# EAGLE board etch_a_sketch (EAGLE 9.6.2)
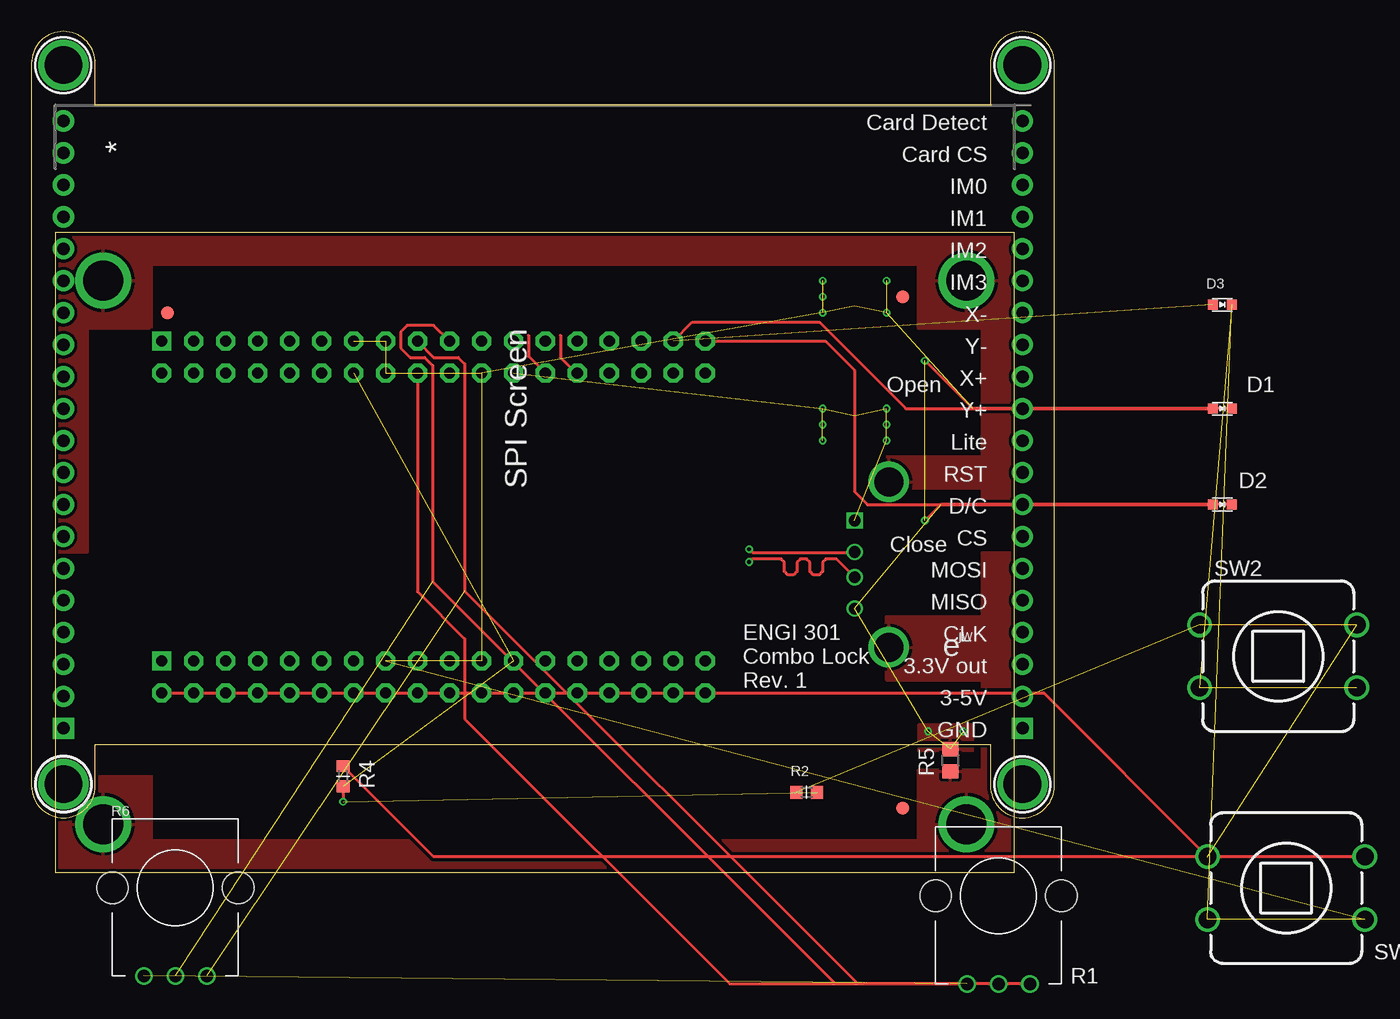
[diagram p0: board, top side]
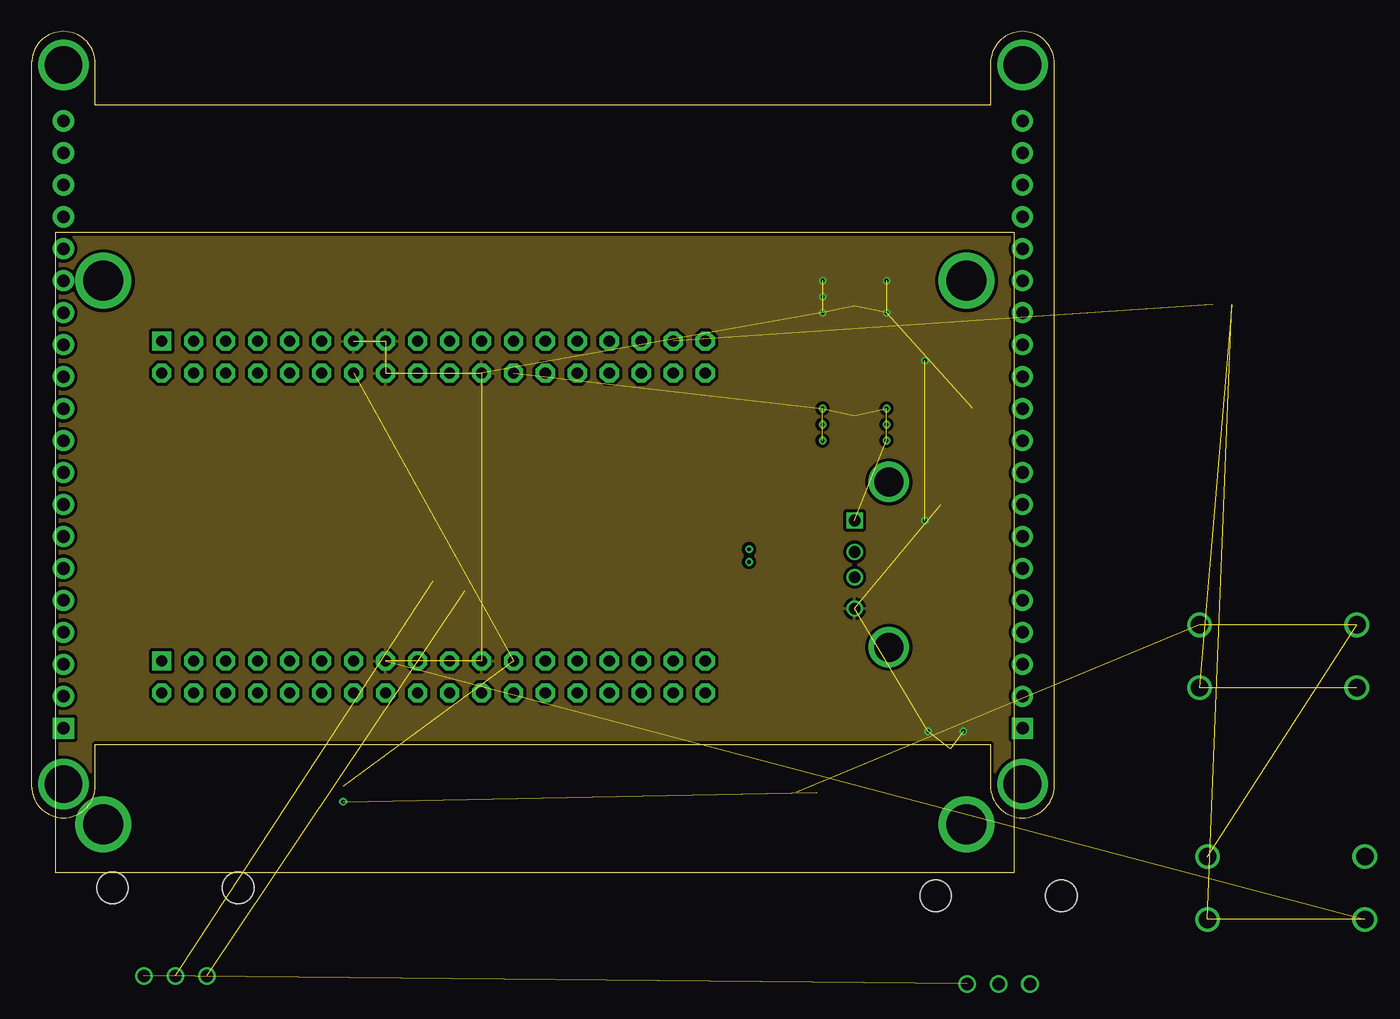
[diagram p1: board, inner layer Route2]
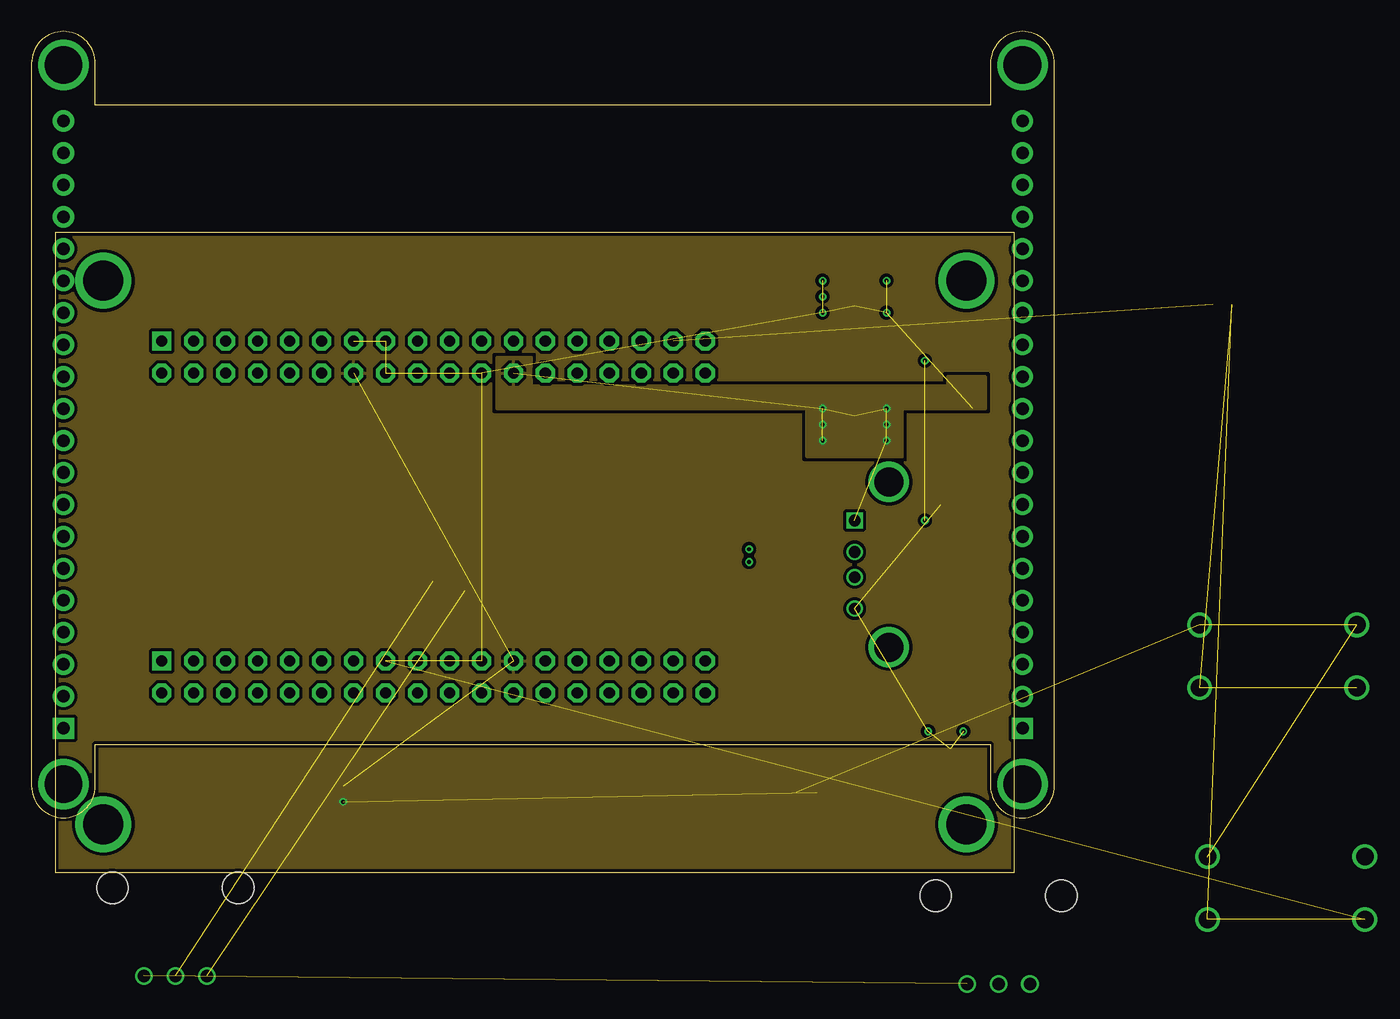
[diagram p2: board, inner layer Route15]
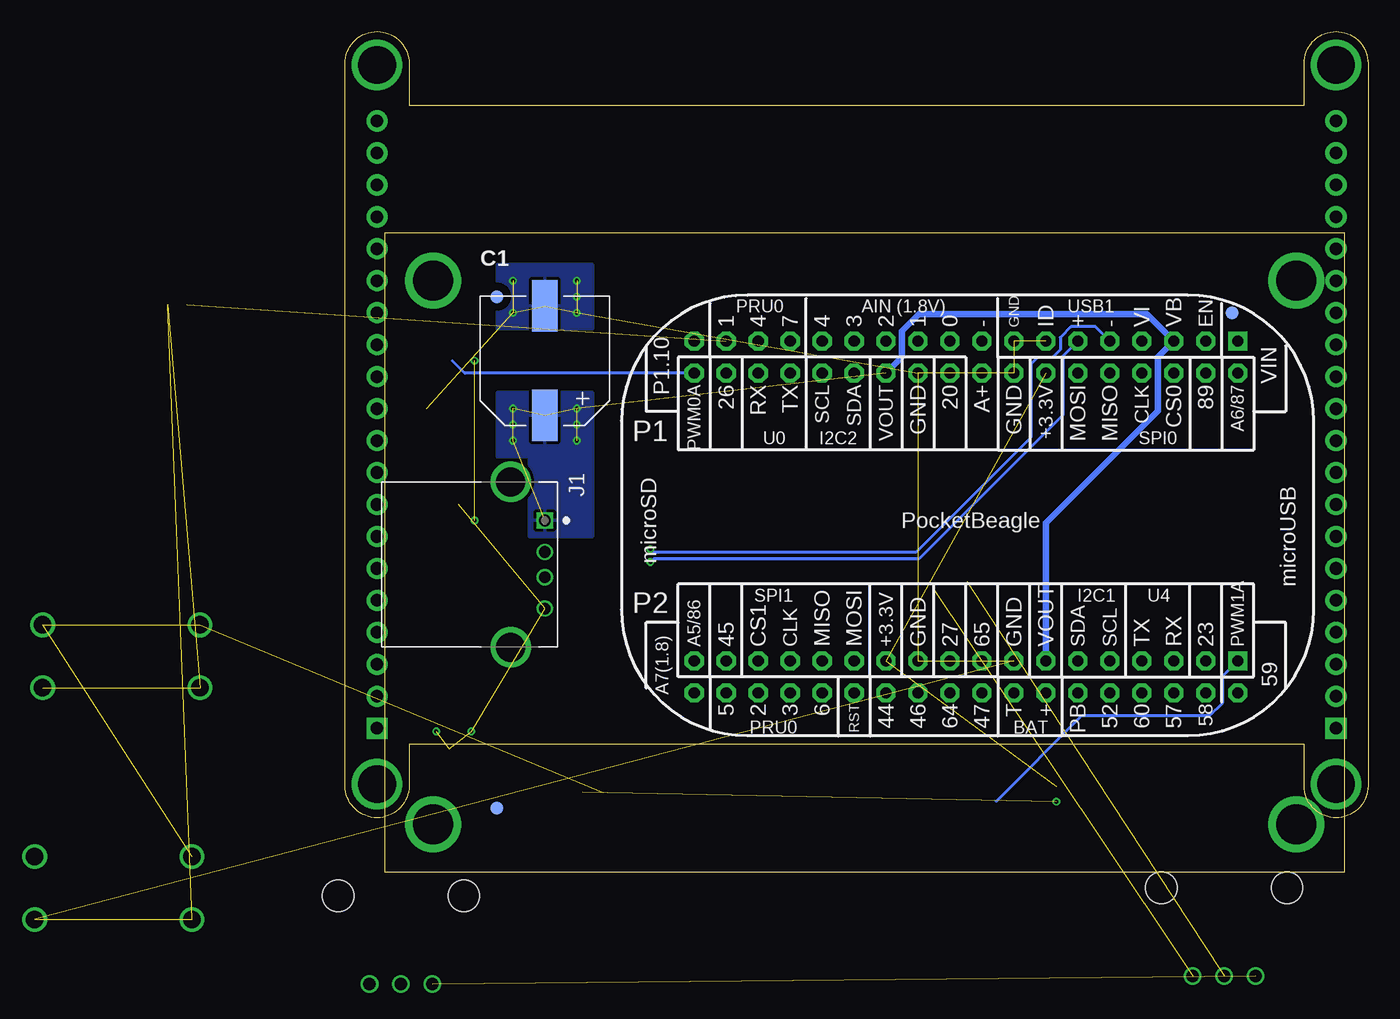
[diagram p3: board, bottom side, seen from below]

Size 81.28 x 66.8 mm. Coordinates in mm from the lower left corner, seen from the top.
Outline: 1.91,0 78.11,0 78.11,50.8 1.91,50.8 1.91,0
Copper layers (1*2*15*16): Top 0.035mm / dielectric 0.23mm / Route2 0.035mm / dielectric 0.93mm / Route15 0.035mm / dielectric 0.23mm / Bottom 0.035mm
Design rules "ENGI301_4lyr": minimum track width 10mil, minimum drill 12mil, track to track 10mil, track to pad 10mil, pad to pad 10mil, via to via 10mil, smd to smd 10mil, copper to edge 10mil, drill to drill 12mil, minimum pad ring 6mil, minimum via ring 6mil, stop-mask expansion 3mil, vias tented up to drill 25mil, thermal gap 10mil

## Footprints (pad centres in the part's own frame; a part is rotated, then mirrored left to right if it is on the bottom)
CP10MM = smd 2 x 4.1: P$1 0,-4.35; P$2 0,4.35
EIA-STD = smd 0.8 x 0.8: ANODE -0.75,0; CATHODE 0.75,0
FIDUCIAL_40MIL = smd 1.016 x 1.016: P$1 0,0
TE_292303-1 = drill 0.92 square: 1 0,0 | drill 0.92: 2 2.5,0; 3 4.5,0; 4 7,0 | drill 2.3: SH1 -3.07,-2.71; SH2 10.07,-2.71
TFT_LCD_PCB = drill 1 pad 1.676 square: 1@JP1 -24.13,38.1; 1@JP2 -24.13,-38.1 | drill 1 pad 1.676: 2@JP1 -21.59,38.1; 2@JP2 -21.59,-38.1; 3@JP1 -19.05,38.1; 3@JP2 -19.05,-38.1; 4@JP1 -16.51,38.1; 4@JP2 -16.51,-38.1; 5@JP1 -13.97,38.1; 5@JP2 -13.97,-38.1; 6@JP1 -11.43,38.1; 6@JP2 -11.43,-38.1; 7@JP1 -8.89,38.1; 7@JP2 -8.89,-38.1; 8@JP1 -6.35,38.1; 8@JP2 -6.35,-38.1; 9@JP1 -3.81,38.1; 9@JP2 -3.81,-38.1; 10@JP1 -1.27,38.1; 10@JP2 -1.27,-38.1; 11@JP1 1.27,38.1; 11@JP2 1.27,-38.1; 12@JP1 3.81,38.1; 12@JP2 3.81,-38.1; 13@JP1 6.35,38.1; 13@JP2 6.35,-38.1; 14@JP1 8.89,38.1; 14@JP2 8.89,-38.1; 15@JP1 11.43,38.1; 15@JP2 11.43,-38.1; 16@JP1 13.97,38.1; 16@JP2 13.97,-38.1; 17@JP1 16.51,38.1; 17@JP2 16.51,-38.1; 18@JP1 19.05,38.1; 18@JP2 19.05,-38.1; 19@JP1 21.59,38.1; 19@JP2 21.59,-38.1; 20@JP1 24.13,38.1; 20@JP2 24.13,-38.1 | drill 3 pad 3.6: P$1@U$7 -28.575,-38.1; P$1@U$15 28.575,-38.1; P$1@U$16 -28.575,38.1; P$1@U$17 28.575,38.1
MOUNTING_HOLE = drill 3.175 pad 4.445: P$1 0,0
POT-PO90S = drill 1: CCW -2.5,0; CW 2.5,0; S 0,0 | hole 2.5: -5,7; 5,7
R0603 = smd 0.95 x 1.031: 1 -0.8,0; 2 0.8,0
R0805 = smd 1.143 x 1.27: 1 -0.889,0; 2 0.889,0
BUTTON_12.5MM = drill 1.4: 1 -6.25,2.5; 2 -6.25,-2.5; 3 6.25,2.5; 4 6.25,-2.5
POCKETBEAGLE = drill 0.889 pad 1.524 square: P1_01 5.91,3.53; P2_01 5.91,28.93 | drill 0.889 pad 1.524 octagon: P1_02 5.91,6.07; P1_03 8.45,3.53; P1_04 8.45,6.07; P1_05 10.99,3.53; P1_06 10.99,6.07; P1_07 13.53,3.53; P1_08 13.53,6.07; P1_09 16.07,3.53; P1_10 16.07,6.07; P1_11 18.61,3.53; P1_12 18.61,6.07; P1_13 21.15,3.53; P1_14 21.15,6.07; P1_15 23.69,3.53; P1_16 23.69,6.07; P1_17 26.23,3.53; P1_18 26.23,6.07; P1_19 28.77,3.53; P1_20 28.77,6.07; P1_21 31.31,3.53; P1_22 31.31,6.07; P1_23 33.85,3.53; P1_24 33.85,6.07; P1_25 36.39,3.53; P1_26 36.39,6.07; P1_27 38.93,3.53; P1_28 38.93,6.07; P1_29 41.47,3.53; P1_30 41.47,6.07; P1_31 44.01,3.53; P1_32 44.01,6.07; P1_33 46.55,3.53; P1_34 46.55,6.07; P1_35 49.09,3.53; P1_36 49.09,6.07; P2_02 5.91,31.47; P2_03 8.45,28.93; P2_04 8.45,31.47; P2_05 10.99,28.93; P2_06 10.99,31.47; P2_07 13.53,28.93; P2_08 13.53,31.47; P2_09 16.07,28.93; P2_10 16.07,31.47; P2_11 18.61,28.93; P2_12 18.61,31.47; P2_13 21.15,28.93; P2_14 21.15,31.47; P2_15 23.69,28.93; P2_16 23.69,31.47; P2_17 26.23,28.93; P2_18 26.23,31.47; P2_19 28.77,28.93; P2_20 28.77,31.47; P2_21 31.31,28.93; P2_22 31.31,31.47; P2_23 33.85,28.93; P2_24 33.85,31.47; P2_25 36.39,28.93; P2_26 36.39,31.47; P2_27 38.93,28.93; P2_28 38.93,31.47; P2_29 41.47,28.93; P2_30 41.47,31.47; P2_31 44.01,28.93; P2_32 44.01,31.47; P2_33 46.55,28.93; P2_34 46.55,31.47; P2_35 49.09,28.93; P2_36 49.09,31.47

## Placement (x,y rotation side)
C1  220uF  [CP10MM]  65.41,40.64 0 bottom
D1  GRN LED  [EIA-STD]  94.61,36.83 0 top  (outside the outline)
D2  RED LED  [EIA-STD]  94.61,29.21 0 top  (outside the outline)
D3  GRN LED  [EIA-STD]  94.61,45.09 0 top  (outside the outline)
FUD1  FIDUCIAL  [FIDUCIAL_40MIL]  69.22,45.72 0 top
FUD2  FIDUCIAL  [FIDUCIAL_40MIL]  69.22,5.08 0 top
FUD3  FIDUCIAL  [FIDUCIAL_40MIL]  10.8,44.45 0 bottom
FUD4  FIDUCIAL  [FIDUCIAL_40MIL]  69.22,45.72 0 bottom
FUD5  FIDUCIAL  [FIDUCIAL_40MIL]  69.22,5.08 0 bottom
FUD6  FIDUCIAL  [FIDUCIAL_40MIL]  10.8,44.45 0 top
J1  292303-1  [TE_292303-1]  65.41,27.94 270 bottom
J2  SPI_LCD  [TFT_LCD_PCB]  40.64,35.56 90 top
MGT1  MOUNTING_HOLE  [MOUNTING_HOLE]  5.72,46.99 0 top
MGT2  MOUNTING_HOLE  [MOUNTING_HOLE]  5.72,3.81 0 top
MGT3  MOUNTING_HOLE  [MOUNTING_HOLE]  74.3,3.81 0 top
MGT4  MOUNTING_HOLE  [MOUNTING_HOLE]  74.3,46.99 0 top
R1  POTENTIOMETER  [POT-PO90S]  76.84,-8.89 0 top
R2  1k  [R0603]  61.59,6.35 0 top
R4  1k  [R0603]  24.77,7.62 270 top
R5  0.1  [R0805]  73.03,8.89 90 top
R6  POTENTIOMETER  [POT-PO90S]  11.43,-8.26 0 top
SW1  PUSH_BUTTON  [BUTTON_12.5MM]  99.7,-1.27 0 top  (outside the outline)
SW2  PUSH_BUTTON  [BUTTON_12.5MM]  99.06,17.14 0 top  (outside the outline)
U1  POCKETBEAGLE  [POCKETBEAGLE]  4.45,45.72 180 bottom

## Library data of the parts
C1 = combo_lock; POPULATE: 1
D1-D3 FUD1-FUD6 MGT1-MGT4 R1 R2 R4-R6 SW1 SW2 U1 = combo_lock
J1 = combo_lock; AVAILABILITY: In Stock; CENTERLINE_PITCH: 2 mm[.078 in]; COMMENT: 292303-1; DESCRIPTION: Conn; Data; USB; Recept; 2.0; 4 Pos; 1 Port; Rt Angle; A Ser; Tin over Copper; EU_ROHS_COMPLIANCE: Compliant; MF: TE Connectivity; MP: 292303-1; NUMBER_OF_POSITIONS: 4; PACKAGE: None; PRICE: None; PRODUCT_TYPE: Connector; PURCHASE-URL: https://pricing.snapeda.com/search/part/292303-1/?ref=eda
J2 = Etch-a-sketch

## Nets
AGND: R1.CW R6.CW U1.P1_17
AGND1: U1.P1_21
BAT.VIN: U1.P2_14
BUTTON1: U1.P2_04
BUZZER: U1.P2_01
CGND: J1.SH1 J1.SH2 MGT1.P$1 MGT2.P$1 MGT3.P$1 MGT4.P$1 R5.1
GND: C1.P$2 D1.CATHODE D2.CATHODE D3.CATHODE J1.4 R5.2 SW1.2 SW1.4 SW2.2 SW2.4 U1.P1_13 U1.P1_15 U1.P1_16 U1.P1_22 U1.P2_15 U1.P2_21
GREEN_LED: D1.ANODE D3.ANODE U1.P1_33
GREEN_LED1: U1.P2_32
I2C2_SCL: U1.P1_28
I2C2_SDA: U1.P1_26
LEFT_POTENTIOMETER: R1.S R6.S U1.P1_19
N$1: J2.3@JP2
N$2: J2.4@JP2
N$3: J2.5@JP2
N$4: J2.6@JP2
N$5: J2.7@JP2
N$6: J2.8@JP2
N$7: J2.9@JP2
N$8: J2.1@JP2
RED_LED: D2.ANODE U1.P1_35
RESET_BUTTON: R2.1 R4.1 SW1.1 SW1.3 SW2.1 SW2.3 U1.P2_02
SERVO: U1.P1_36
USB1_DM: J1.2 U1.P1_09
USB1_DP: J1.3 U1.P1_11
VDD_1P8V: R1.CCW R6.CCW U1.P1_18
VDD_3P3V: R2.2 R4.2 U1.P1_14 U1.P2_23
VDD_5V: C1.P$1 J1.1 U1.P1_05 U1.P1_24 U1.P2_13
VIN: U1.P1_01

## Tracks (layer width: path | path; a pad name or v marks a point on that pad's centre or on a via)
AGND  (1 unrouted)
  Top 0.254: U1.P1_17 31.97,40.89 33.91,40.89 34.42,40.39 34.42,22.35 65.66,-8.89 R1.CW
BUZZER
  Bottom 0.254: U1.P2_01 11.56,15.59 11.56,13.46 12.57,12.45 22.73,12.45 29.54,5.64
CGND
  pour Top: -0.63,-2.54 -0.63,25.4 4.45,25.4 4.45,7.62 9.53,7.62 9.53,2.54 70.48,2.54 70.48,8.13 75.56,8.13 75.56,15.24 67.95,15.24 67.95,20.32 74.3,20.32 75.56,20.32 75.56,21.59 75.56,25.4 80.64,25.4 80.64,-2.54
  pour Top: -0.63,25.4 -0.63,53.34 80.64,53.34 80.64,25.4 75.56,25.4 75.56,30.48 67.95,30.48 67.95,33.02 75.56,33.02 75.56,43.18 70.48,43.18 70.48,48.26 9.53,48.26 9.53,43.18 4.45,43.18 4.45,25.4
GND  (via drill 0.3 pad 0.61)  (22 unrouted)
  Top 0.254: D2.CATHODE 72.26,29.21 v70.99,27.94 | D1.CATHODE 74.8,36.83 v70.99,40.64
  other vias: 71.25,11.18 74.04,11.18 62.87,46.99 62.87,45.72 62.87,44.45 67.95,44.45 67.95,46.99
  pour Route2: -3.17,55.88 80.64,55.88 83.19,55.88 83.19,-5.08 -3.17,-5.08
  pour Top: 70.48,9.65 74.8,9.65 74.8,11.68 70.48,11.68
  pour Bottom: 61.59,43.18 61.59,48.26 69.22,48.26 69.22,43.18
GREEN_LED  (1 unrouted)
  Top 0.254: U1.P1_33 52.49,43.69 62.61,43.69 69.47,36.83 D1.ANODE
I2C2_SCL
  Top 0.254: 42.04,42.67 42.04,40.89 43.28,39.65 U1.P1_28 43.31,39.58
I2C2_SDA
  Top 0.254: U1.P1_26 40.77,39.72 40.69,39.8 39.5,40.99 39.5,42.67
LEFT_POTENTIOMETER  (1 unrouted)
  Top 0.254: U1.P1_19 31.97,43.43 29.85,43.43 29.34,42.93 29.34,41.66 30.1,40.89 31.25,40.89 31.88,40.27 31.88,23.11 63.88,-8.89 R1.S
RED_LED
  Top 0.254: U1.P1_35 63.09,42.19 65.41,39.88 65.41,30.23 66.42,29.21 D2.ANODE
RESET_BUTTON  (3 unrouted)
  Top 0.254: R4.1 31.96,1.23 SW1.3 SW1.1 80.42,14.25 U1.P2_02
SERVO
  Bottom 0.254: U1.P1_36 71.78,39.65 72.77,40.64
USB1_DM  (via drill 0.3 pad 0.61)
  Top 0.254: v57.02,25.65 57.28,25.4 65.37,25.4 J1.2
  Bottom 0.254: U1.P1_09 21.66,43.33 23.6,43.33 24.45,42.48 24.45,41.51 25.07,40.89 26.29,40.89 26.8,40.39 26.8,34.54 35.94,25.4 56.77,25.4 v57.02,25.65
USB1_DP  (via drill 0.3 pad 0.61)
  Top 0.254: v57.02,24.64 57.28,24.89 59.56,24.89 59.82,24.64 59.82,23.88 60.07,23.62 60.58,23.62 60.83,23.88 60.83,24.64 61.09,24.89 61.59,24.89 61.85,24.64 61.85,23.88 62.1,23.62 62.61,23.62 62.87,23.88 62.87,24.64 63.12,24.89 63.95,24.89 J1.3
  Bottom 0.254: U1.P1_11 24.26,40.99 24.26,36.32 35.69,24.89 56.77,24.89 v57.02,24.64
VDD_1P8V  (1 unrouted)
  Top 0.254: U1.P1_18 30.68,22.28 34.42,18.54 34.42,12.19 55.5,-8.89 R1.CCW
VDD_3P3V  (via drill 0.3 pad 0.61)  (3 unrouted)
  Top 0.254: R4.2 v24.77,5.59
  pour Route15 (rank 6): -5.71,58.42 85.72,58.42 85.72,-7.62 -5.71,-7.62
VDD_5V  (via drill 0.3 pad 0.61)  (8 unrouted)
  Bottom 0.508: U1.P2_13 25.6,27.75 16.71,36.63 16.71,40.92 U1.P1_05 17.57,44.32 35.69,44.32 37.02,42.98 37.02,40.92 U1.P1_24
  other vias: 62.87,36.83 67.95,36.83 67.95,35.56 67.95,34.29 62.87,35.56 62.87,34.29
  pour Route15: 36.96,40.89 36.96,36.83 61.59,36.83 61.59,33.02 69.22,33.02 69.22,36.83 75.82,36.83 75.82,39.37 72.77,39.37 72.77,38.61 39.75,38.61 39.75,40.89
  pour Bottom: 61.59,26.67 61.59,38.1 69.22,38.1 69.22,33.02 66.67,33.02 66.67,26.67

## Text on the board
tPlace: Open | Close | jw | ENGI 301 / Combo Lock | e | Rev. 1